# Altium PCB Constant Current Load.PcbDoc
Units mm, origin at the board's own origin, x right, y up, seen from the top; angles counter-clockwise.
Board outline 80 x 49 mm, 2 copper layers (Top Layer, Bottom Layer); 14 components, 9 nets, 53 pads, 0 vias.
Unrouted connection lines stored in the file: 36.
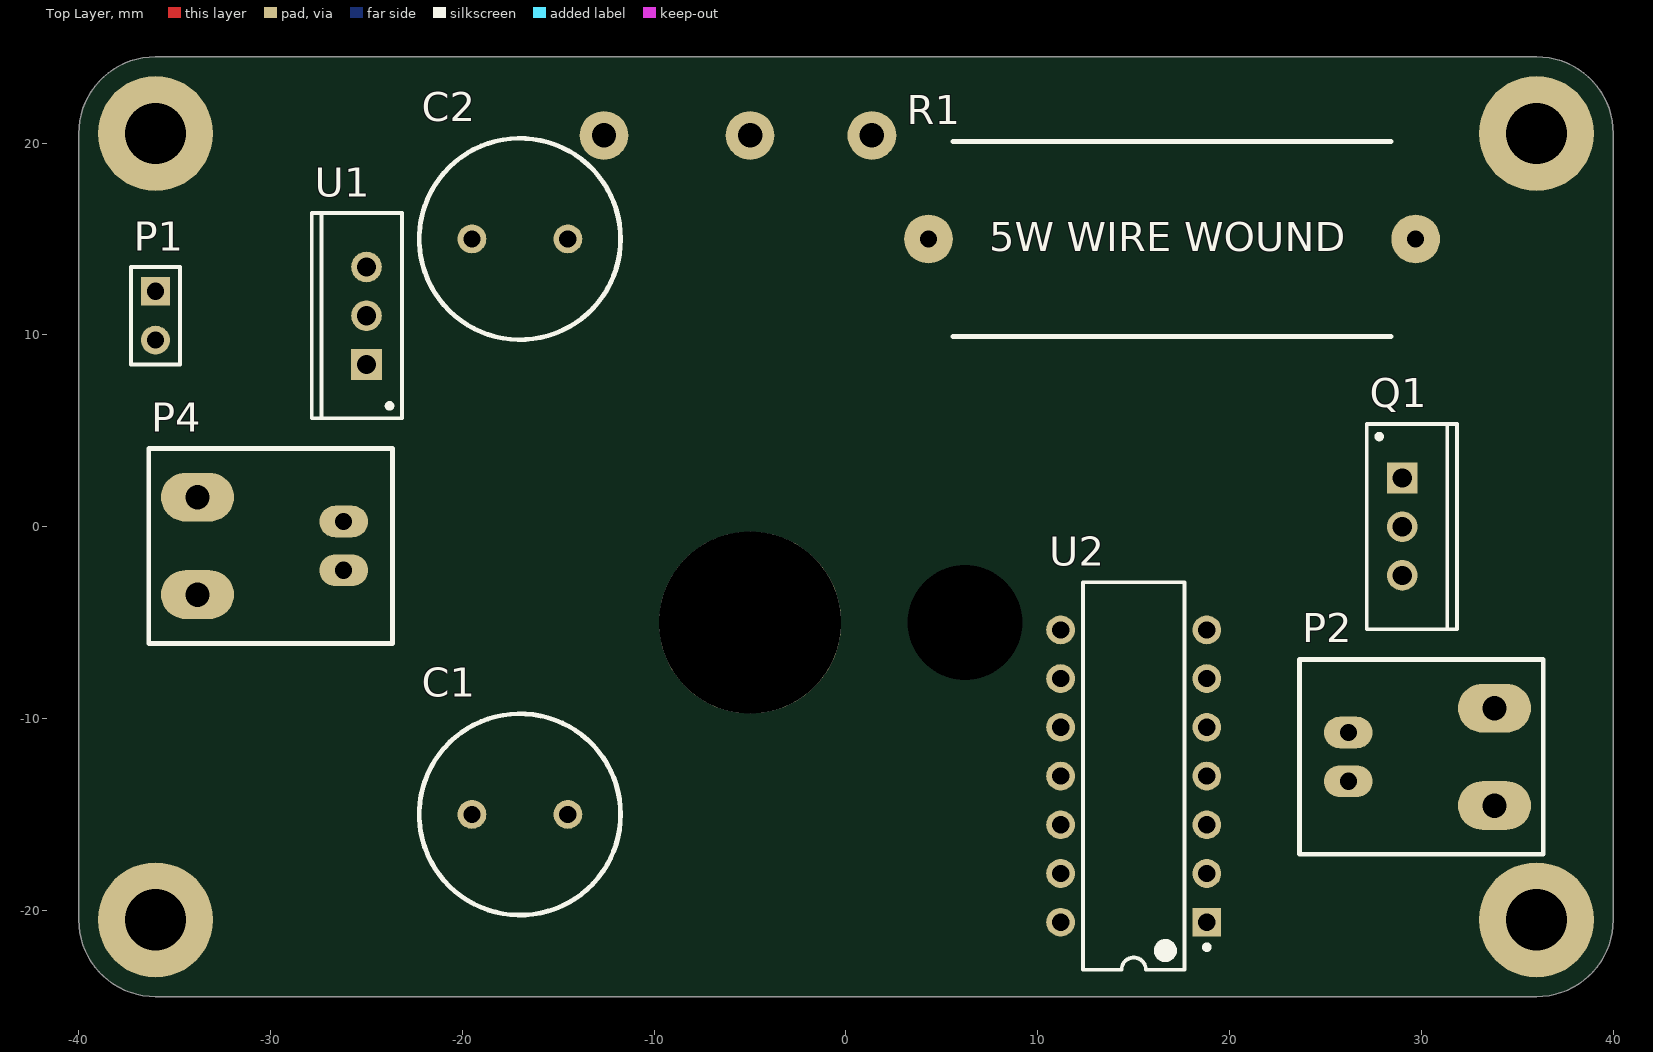
[diagram p0: Top Layer view]
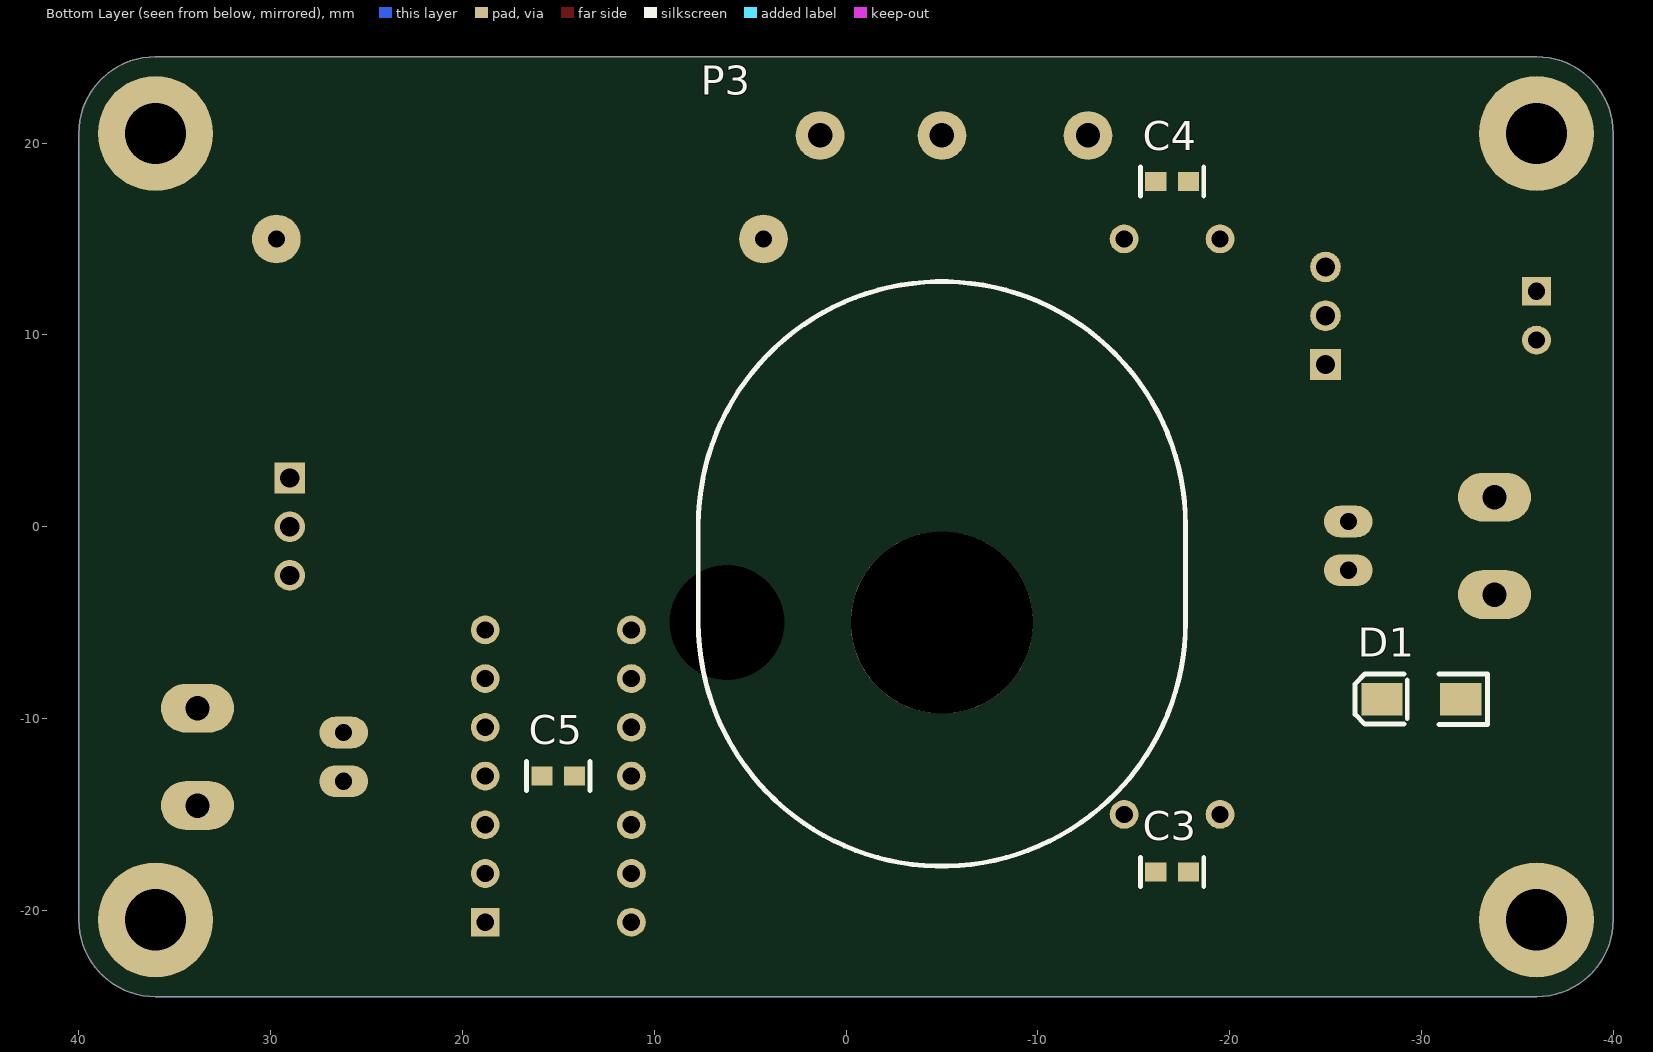
[diagram p1: Bottom Layer view, seen from below]

## Layer stack, top to bottom
Top Layer: signal copper 0.0356
Dielectric: dielectric 0.32, FR-4, Dk 4.8
Bottom Layer: signal copper 0.0356

## Board outline
-40,-20.5 -40,20.5 cw(c-36,20.5) -36,24.5 36,24.5 cw(c36,20.5) 40,20.5 40,-20.5 cw(c36,-20.5) 36,-24.5 -36,-24.5 cw(c-36,-20.5)

## Design rules (kind name [scope] priority, off if disabled: settings)
Clearance [All] p1: gap=0.254
PolygonConnect [All] p1: connectstyle=Relief reliefconductorwidth=0.254 reliefentries=4 polygonreliefangle="90 Angle" airgapwidth=0.254
RoutingVias [All] p1: holewidth=0.711 width=1.27 viastyle="Through Hole" minholewidth=0.711 minwidth=1.27 maxholewidth=0.711 maxwidth=1.27
SolderMaskExpansion [All] p1: expansion=0.102
Width [All] p1: maxlimit=2.54 minlimit=0.254 preferedwidth=0.254
28 further rules are at their usual default settings.

## Classes and differential pairs
component class "Constant Current": C1 C2 C3 C5 D1 P1 P2 P3 P4 Q1 R1 U1 U2

## Components (designator, comment, footprint, x,y, rotation, side; value= is the part's Value field where it differs from the comment)
C1 "100uF" RB5-10.5 -17,-15 r0 top
C2 "100uF" RB5-10.5 -17,15 r0 top
C3 "100nF" "CAP (3D) - 0603" -17,-18 r180 bottom
C4 "100nF" "CAP (3D) - 0603" -17,18 r180 bottom
C5 "100nF" "CAP (3D) - 0603" 15,-13 r180 bottom
D1 "S1M" DO-214AC -30,-9 r0 bottom
P1 "Header 2" HDR1X2 -36,12.27 r270 top
P2 "PSU IN" "PSU IN" 30,-12 r0 top
P3 "TRIMPOT" "PCB POT" -5,-5 r0 bottom
P4 "PSU IN" "PSU IN" -30,-1 r180 top
Q1 "MTP3055" TO-220AB 29,0 r270 top
R1 "SHUNT" "5W WW" 17,15 r0 top
U1 "MC7805ACT" TO-220AB -25,11 r90 top
U2 "LM324AN" DIP-14 15,-13 r180 top

## Footprints (in the part's own frame and the unit in brackets; to place one, negate y for a bottom-side part, rotate by r counter-clockwise, add the part's x,y. Pads: shape width x height; smd on the part's side, far side on the other; paste and mask are expansions set on the pad)
"5W WW" [mil] "5W WIRE WOUND RESISTOR"
  round 100 hole 35: 1(-500,0) 2(500,0)
  silkscreen extent -450,-200 450,200
"CAP (3D) - 0603" [mm]
  rect 1.1x1 smd: 1(0.85,0) 2(-0.85,0)
  silkscreen extent -1.65,-0.76 1.65,0.76, body extent -0.8,-0.4 0.8,0.4, height 0.92
DIP-14 [mm] "DIP; 14 Leads; Row Spacing 7.62 mm; Pitch 2.54 mm"
  rect 1.5x1.5 hole 0.9: 1(-3.81,7.62)
  round 1.5 hole 0.9: 2(-3.81,5.08) 3(-3.81,2.54) 4(-3.81,0) 5(-3.81,-2.54) 6(-3.81,-5.08) 7(-3.81,-7.62) 8(3.81,-7.62) 9(3.81,-5.08) 10(3.81,-2.54) 11(3.81,0) 12(3.81,2.54) 13(3.81,5.08) 14(3.81,7.62)
  silkscreen extent -3.94,-10.1 2.65,10.1, body extent -3.6,-10.1 3.6,10.1, height 5.08
DO-214AC [mil]
  rect 85x67 smd: 1(-81,0) 2(81,0)
  silkscreen extent -136,-52 136,52, body extent -79,-39 79,39, height 61
HDR1X2 [mm] "Connector; Header; 2 Position"
  rect 1.5x1.5 hole 0.9: 1(0,0)
  round 1.5 hole 0.9: 2(2.54,0)
  silkscreen extent -1.27,-1.27 3.81,1.27
"PCB POT" [mm]
  round 2.54 hole 1.27 unplated: 1(-7.62,-25.4) 2(0,-25.4) 3(6.35,-25.4)
  round 5 hole 6 unplated: LOCK(11.2,0)
  round 9.5 hole 9.5 unplated: SHAFT(0,0)
  silkscreen extent -12.7,-17.78 12.7,12.7
"PSU IN" [mil]
  oval 100x65 hole 35: 1(-150,50) 2(-150,-50)
  oval 150x100 hole 50: 1(150,100) 2(150,-100)
  silkscreen extent -250,-200 250,200
RB5-10.5 [mm] "Capacitor (Radial); 2 Leads"
  round 1.5 hole 0.9: 1(-2.5,0) 2(2.5,0)
  silkscreen extent -5.25,-5.25 5.25,5.25
TO-220AB [mm] "TO, Thru-Hole, Vertical, Heatsink Mounted; 3 In-Line Leads; Pitch 2.54 mm"
  rect 1.6x1.6 hole 1: 1(-2.54,0)
  round 1.6 hole 1: 2(0,0) 3(2.54,0)
  silkscreen extent -5.35,-1.85 5.35,2.85, body extent -5.4,-1.9 5.4,2.9, height 19.3

## Part data
C1 C2: library part "Cap Pol", "CAPACITOR POLARISED TAG B CASE"
C3 C4: library part CAP, "CAPACITOR SMD 0603"
C5: library part Cap, "Capacitor"
D1: library part DIODE, "DIODE, POWER"
P1: "Header, 2-Pin"
P2 P4: library part "Header 2", "Header, 2-Pin"
P3: library part "Header 3", "Header, 3-Pin"
Q1: library part MOSFET-P4, "P-Channel MOSFET"
R1: library part Res2, "Resistor"
U1: "3-Terminal Positive Fixed Voltage Regulator"
U2: "Quadruple Operational Amplifier"

## Free pads (board coordinates)
  round 6 hole 3.2: 0(-36,-20.5) 0(-36,20.5) 0(36,-20.5) 0(36,20.5)

## Nets (pads, with @x,y where several pads share a name; then routed paths per layer and width w, separated by ;. In a path a pad name is that pad's centre, name@x,y a point inside that pad or via, vN(x,y) a via of type N, cw(c..) or ccw(c..) an arc to the next point about the centre after c; other vN are vias at no path point)
GND: C1.2 C2.2 C3.2 C4.2 C5.1 P1.2 P2.2 P3.3 P4.2 R1.1 U1.2 U2.9 U2.11 U2.13
NetP2_1: P2.1 Q1.3
NetP3_2: P3.2 U2.5
NetQ1_1: Q1.1 U2.1 U2.2
NetQ1_2: Q1.2 R1.2 U2.6
NetU2_3: U2.3 U2.7
V+: C1.1 C3.1 D1.2 U1.1
VCC: C2.1 C4.1 C5.2 P1.1 P3.1 U1.3 U2.4 U2.10 U2.12
VIN: D1.1 P4.1
pads on no net: P3.LOCK P3.SHAFT U2.8 U2.14

## Polygon pours and split planes (outlines as drawn)
GND on Bottom Layer "Mechanical 3-No Net" (solid, shelved, pour order 2): -40,-20.5 -40,20.5 cw(c-36,20.5) -36,24.5 36,24.5 cw(c36,20.5) 40,20.5 40,-20.5 cw(c36,-20.5) 36,-24.5 -36,-24.5 cw(c-36,-20.5)

## Silkscreen, mask and mechanical layers (free items; w line width, h text height)
Mechanical 1:
  the board outline again, w0.254

## Text inside footprints (layer, text, board x,y; h text height)
R1: Top Overlay "5W WIRE WOUND" at 7.475,14.365 h1.52